# EAGLE board NanoDemultiplexerAndSDcardNew (EAGLE 9.5.2)
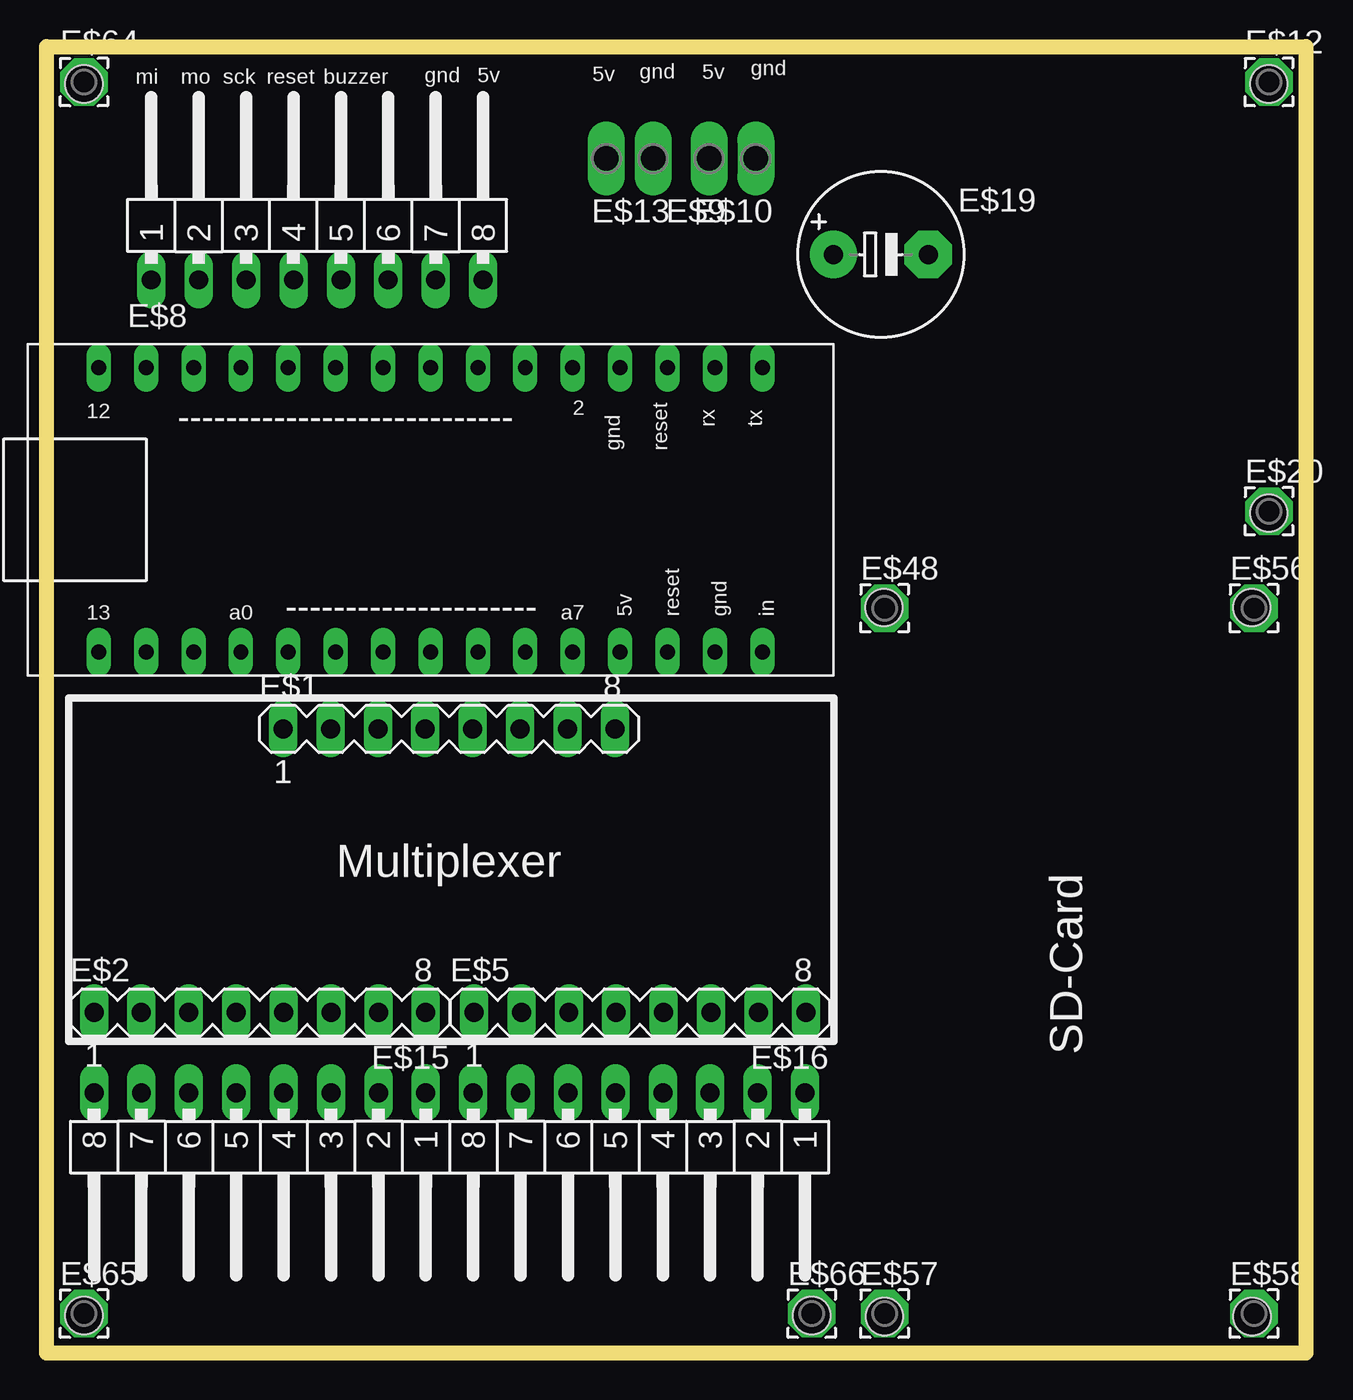
[diagram p0: board, top side]
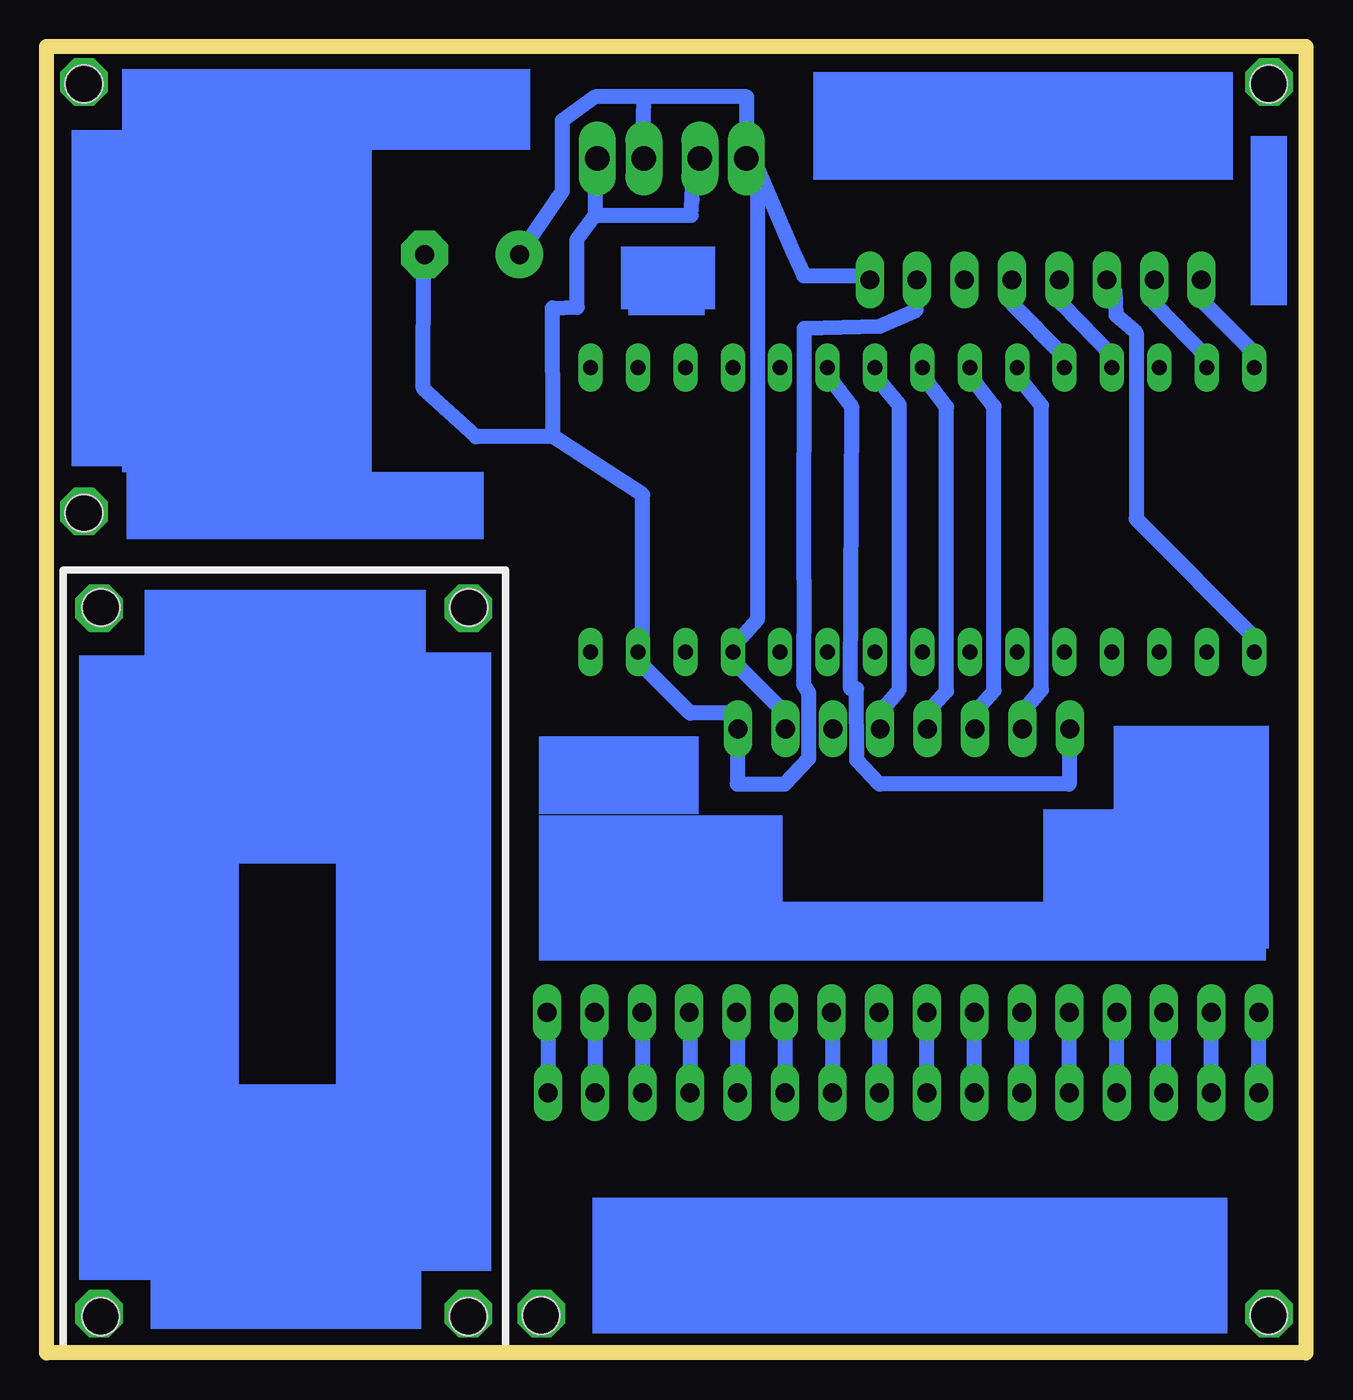
[diagram p1: board, bottom side, seen from below]

Size 67.5 x 70 mm. Coordinates in mm from the lower left corner, seen from the top.
Outline: 0,0 0,70 67.5,70 67.5,0 0,0
Copper layers (1*16): Top 0.035mm / dielectric 1.5mm / Bottom 0.035mm
Design rules "default": minimum track width 10mil, minimum drill 24mil, track to track 8mil, track to pad 8mil, pad to pad 8mil, via to via 8mil, smd to smd 8mil, copper to edge 40mil, drill to drill 8mil, minimum pad ring 10mil, minimum via ring 8mil, stop-mask expansion 4mil, vias tented up to drill 0mil, thermal gap 10mil
Holes 2 mm at 64.59,39.94 64.6,1.95 44.9,1.95 44.87,39.94 2,68 2,2 41,2 65.5,68 65.5,45

## Footprints (pad centres in the part's own frame; a part is rotated, then mirrored left to right if it is on the bottom)
MA08-1 = drill 1.016 long: 1 -8.89,0; 2 -6.35,0; 3 -3.81,0; 4 -1.27,0; 5 1.27,0; 6 3.81,0; 7 6.35,0; 8 8.89,0
ARDUINO-NANO = drill 0.8 long: P$2 -17.78,7.62; P$4 -15.24,7.62; P$5 -12.7,7.62; P$8 -10.16,7.62; P$9 -7.62,7.62; P$12 -5.08,7.62; P$13 -2.54,7.62; P$16 0,7.62; P$17 2.54,7.62; P$20 5.08,7.62; P$21 7.62,7.62; P$24 10.16,7.62; P$25 12.7,7.62; P$28 15.24,7.62; P$29 17.78,7.62; P$31 -17.78,-7.62; P$34 -15.24,-7.62; P$35 -12.7,-7.62; P$38 -10.16,-7.62; P$39 -7.62,-7.62; P$42 -5.08,-7.62; P$43 -2.54,-7.62; P$46 0,-7.62; P$47 2.54,-7.62; P$50 5.08,-7.62; P$51 7.62,-7.62; P$54 10.16,-7.62; P$55 12.7,-7.62; P$58 15.24,-7.62; P$59 17.78,-7.62
MA08-1W = drill 1.016 long: 1 -8.89,0; 2 -6.35,0; 3 -3.81,0; 4 -1.27,0; 5 1.27,0; 6 3.81,0; 7 6.35,0; 8 8.89,0
P1-13Y = drill 1.321 pad 1.905 long: TP 0,0
2,54/0,8 = drill 0.813 pad 2.54 octagon: 1 0,0
E5-8,5 = drill 1.016 pad 2.54: + -2.54,0 | drill 1.016 pad 2.54 octagon: - 2.54,0

## Placement (x,y rotation side)
E$1  [MA08-1]  21.56,33.44 0 top
E$2  [MA08-1]  11.43,18.24 0 top
E$5  [MA08-1]  31.79,18.24 0 top
E$7  [ARDUINO-NANO]  20.57,45.18 0 top
E$8  [MA08-1W]  14.5,57.5 0 top
E$9  [P1-13Y]  35.5,64 180 top
E$10  [P1-13Y]  38,64 180 top
E$12  [2,54/0,8]  65.5,68.1 0 top
E$13  [P1-13Y]  32.5,64 180 top
E$14  [P1-13Y]  30,64 0 top
E$15  [MA08-1W]  11.43,13.94 180 top
E$16  [MA08-1W]  31.75,13.94 180 top
E$19  1000uF  [E5-8,5]  44.7,58.87 0 top
E$20  [2,54/0,8]  65.5,45.1 0 top
E$48  [2,54/0,8]  44.9,39.9 0 top
E$56  [2,54/0,8]  64.7,39.9 0 top
E$57  [2,54/0,8]  44.9,2.1 0 top
E$58  [2,54/0,8]  64.7,2.1 0 top
E$64  [2,54/0,8]  2,68.1 0 top
E$65  [2,54/0,8]  2,2.1 0 top
E$66  [2,54/0,8]  41,2.1 0 top

## Library data of the parts
E$1 E$2 E$5 E$8 E$15 E$16 = con-lstb
E$7 = LSGPackages
E$9 E$10 E$13 E$14 = testpad
E$12 E$20 E$48 E$56-E$58 E$64-E$66 = wirepad
E$19 = ref-packages-longpad

## Nets
5V: E$1.7 E$7.P$54 E$8.8 E$9.TP E$14.TP E$19.+
GND: E$1.8 E$7.P$58 E$8.7 E$10.TP E$13.TP E$19.-
S$2: E$2.1 E$15.8
S$3: E$1.1 E$7.P$20
S$4: E$1.5 E$7.P$17
S$5: E$1.4 E$7.P$16
S$7: E$1.3 E$7.P$13
S$8: E$1.2 E$7.P$12
S$9: E$7.P$9 E$8.5
S$12: E$2.2 E$15.7
S$13: E$2.3 E$15.6
S$14: E$2.4 E$15.5
S$15: E$2.5 E$15.4
S$16: E$2.6 E$15.3
S$17: E$2.7 E$15.2
S$18: E$2.8 E$15.1
S$19: E$5.1 E$16.8
S$20: E$5.2 E$16.7
S$21: E$5.3 E$16.6
S$22: E$5.4 E$16.5
S$23: E$5.5 E$16.4
S$24: E$5.6 E$16.3
S$25: E$5.7 E$16.2
S$26: E$5.8 E$16.1
S$27: E$7.P$2 E$8.1
S$28: E$7.P$4 E$8.2
S$29: E$7.P$31 E$8.3
S$30: E$7.P$8 E$8.4

## Tracks (layer width: path | path; a pad name or v marks a point on that pad's centre or on a via)
5V
  Bottom 0.813: E$1.7 27.94,34.29 30.48,36.83 E$7.P$54 30.48,38.1 29.41,39.29 29.41,63.42 | 29.41,63.42 27.5,59 26.92,57.72 24.13,57.72 E$8.8 | 35.52,67.31 35.56,64.77 E$9.TP | 35.52,67.31 29.98,67.31 29.98,64.77 E$14.TP 29.41,63.42 | 35.52,67.31 38.1,67.31 39.87,66.04 39.87,62.23 41.67,59.61 E$19.+
GND
  Bottom 0.813: 38.1,60.96 32.96,60.96 arc-8 32.92,63.5 E$13.TP | 38.1,60.96 38.1,63.5 E$10.TP | E$8.7 20.89,57.15 20.89,55.88 22.86,55.01 26.89,54.91 26.92,41.6 26.89,41.27 26.92,35.8 26.65,35.37 26.65,31.85 27.94,30.48 30.48,30.48 30.48,33.02 E$1.8 30.48,34.29 33.02,34.29 35.56,36.83 E$7.P$58 35.56,38.1 35.56,45.99 40.37,49.1 | 40.37,49.1 44.5,49.1 47.32,51.68 47.31,58.5 E$19.- | 38.1,60.96 39.07,59.69 39.07,56.03 40.4,56 40.37,49.1
S$2
  Bottom 0.813: E$15.8 2.54,17.78 E$2.1
S$3
  Bottom 0.813: E$7.P$20 25.4,52.07 24.35,50.7 24.42,35.6 24.1,35.6 24.08,31.76 22.86,30.48 12.7,30.48 12.7,33.02 E$1.1
S$4
  Bottom 0.813: E$7.P$17 22.86,52.07 21.81,50.8 21.81,35.56 22.86,34.29 E$1.5
S$5
  Bottom 0.813: E$7.P$16 20.32,52.07 19.27,50.7 19.27,35.46 20.32,34.29 E$1.4
S$7
  Bottom 0.813: E$7.P$13 17.78,52.07 16.73,50.72 16.73,35.48 17.78,34.29 E$1.3
S$8
  Bottom 0.813: E$7.P$12 15.24,52.07 14.19,50.78 14.19,35.54 15.24,34.29 E$1.2
S$9
  Bottom 0.813: E$7.P$9 12.95,53.4 15.77,56.22 E$8.5
S$12
  Bottom 0.813: E$15.7 5.08,17.78 E$2.2
S$13
  Bottom 0.813: E$15.6 7.62,17.78 E$2.3
S$14
  Bottom 0.813: E$15.5 10.16,17.78 E$2.4
S$15
  Bottom 0.813: E$15.4 12.7,17.78 E$2.5
S$16
  Bottom 0.813: E$15.3 15.24,17.78 E$2.6
S$17
  Bottom 0.813: E$15.2 17.78,17.78 E$2.7
S$18
  Bottom 0.813: E$15.1 20.32,17.78 E$2.8
S$19
  Bottom 0.813: E$16.8 22.86,17.78 E$5.1
S$20
  Bottom 0.813: E$16.7 25.4,17.78 E$5.2
S$21
  Bottom 0.813: E$16.6 27.94,17.78 E$5.3
S$22
  Bottom 0.813: E$16.5 30.48,17.78 E$5.4
S$23
  Bottom 0.813: E$16.4 33.02,17.78 E$5.5
S$24
  Bottom 0.813: E$16.3 35.56,17.78 E$5.6
S$25
  Bottom 0.813: E$16.2 38.1,17.78 E$5.7
S$26
  Bottom 0.813: E$16.1 40.64,17.78 E$5.8
S$27
  Bottom 0.813: E$7.P$2 3.02,53.82 5.56,56.36 5.56,57.15 E$8.1
S$28
  Bottom 0.813: E$7.P$4 5.32,53.34 8.1,56.2 8.1,57.47 E$8.2
S$29
  Bottom 0.813: E$7.P$31 2.54,38.1 9.11,44.69 9.11,54.67 10.2,55.6 10.26,56.95 E$8.3
S$30
  Bottom 0.813: E$7.P$8 10.4,53.42 13.1,56.2 13.18,57.15 E$8.4
(copper drawn outside any net)
  shapes: Bottom area x22

## Text on the board
tPlace: mi | mo | sck | reset | buzzer | gnd | 5v | 5v | gnd | 5v | gnd | Multiplexer | SD-Card
bTest: gnd | vcc | vcc | gnd | vcc | gnd | Demultiplexer | SD card | Tx | Vcc battery | Gnd battery